# Altium PCB n24_att.PcbDoc
Units mil, origin at the board's own origin, x right, y up, seen from the top; angles counter-clockwise.
Board outline 1125 x 905 mil, 2 copper layers (Top Layer, Bottom Layer); 13 components, 14 nets, 48 pads, 11 vias.
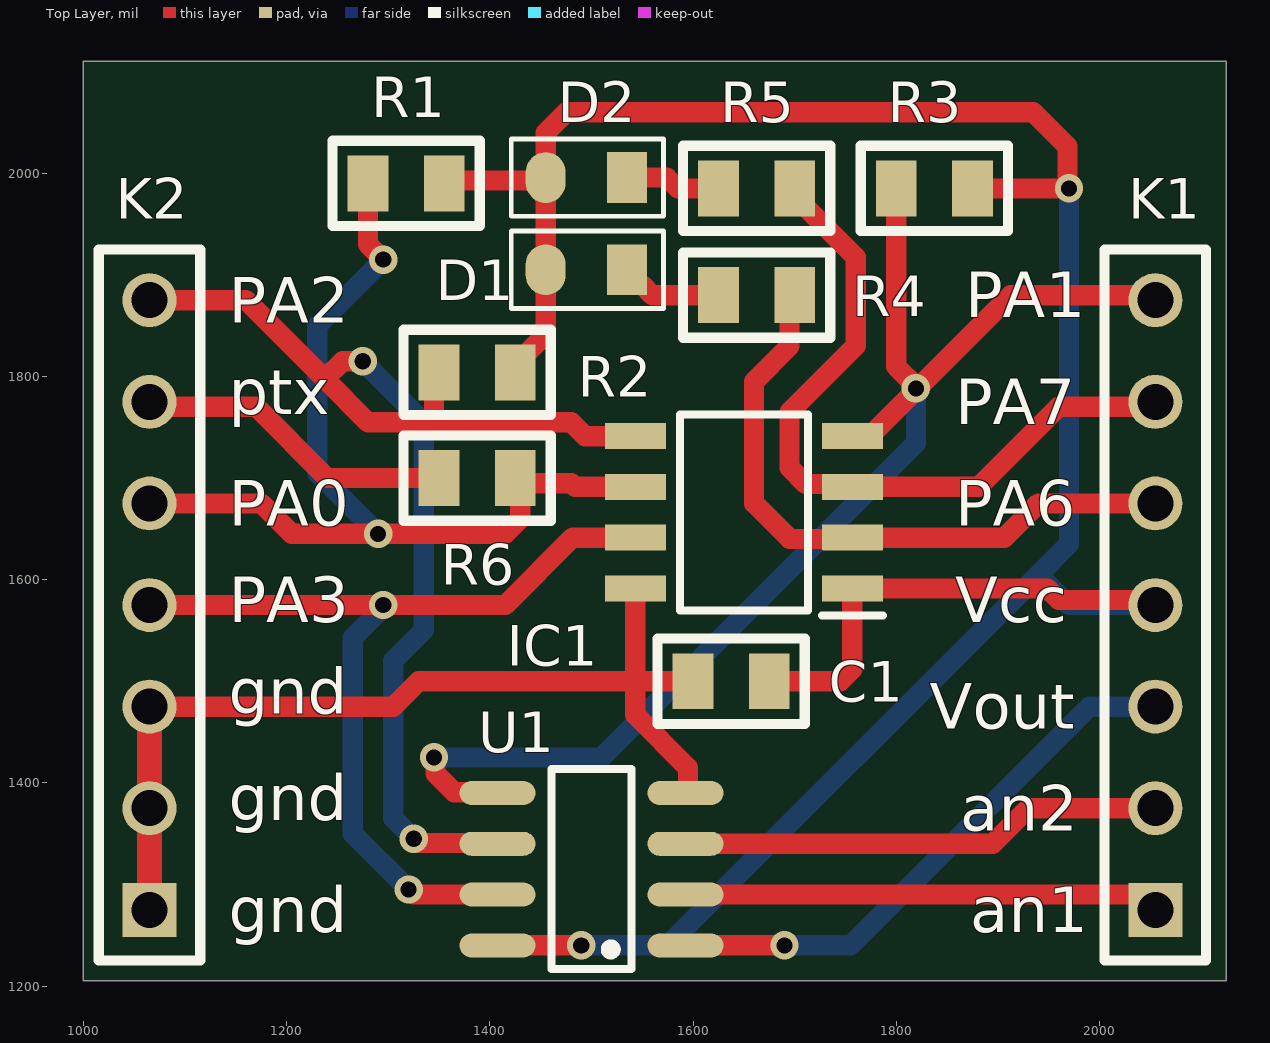
[diagram p0: Top Layer view]
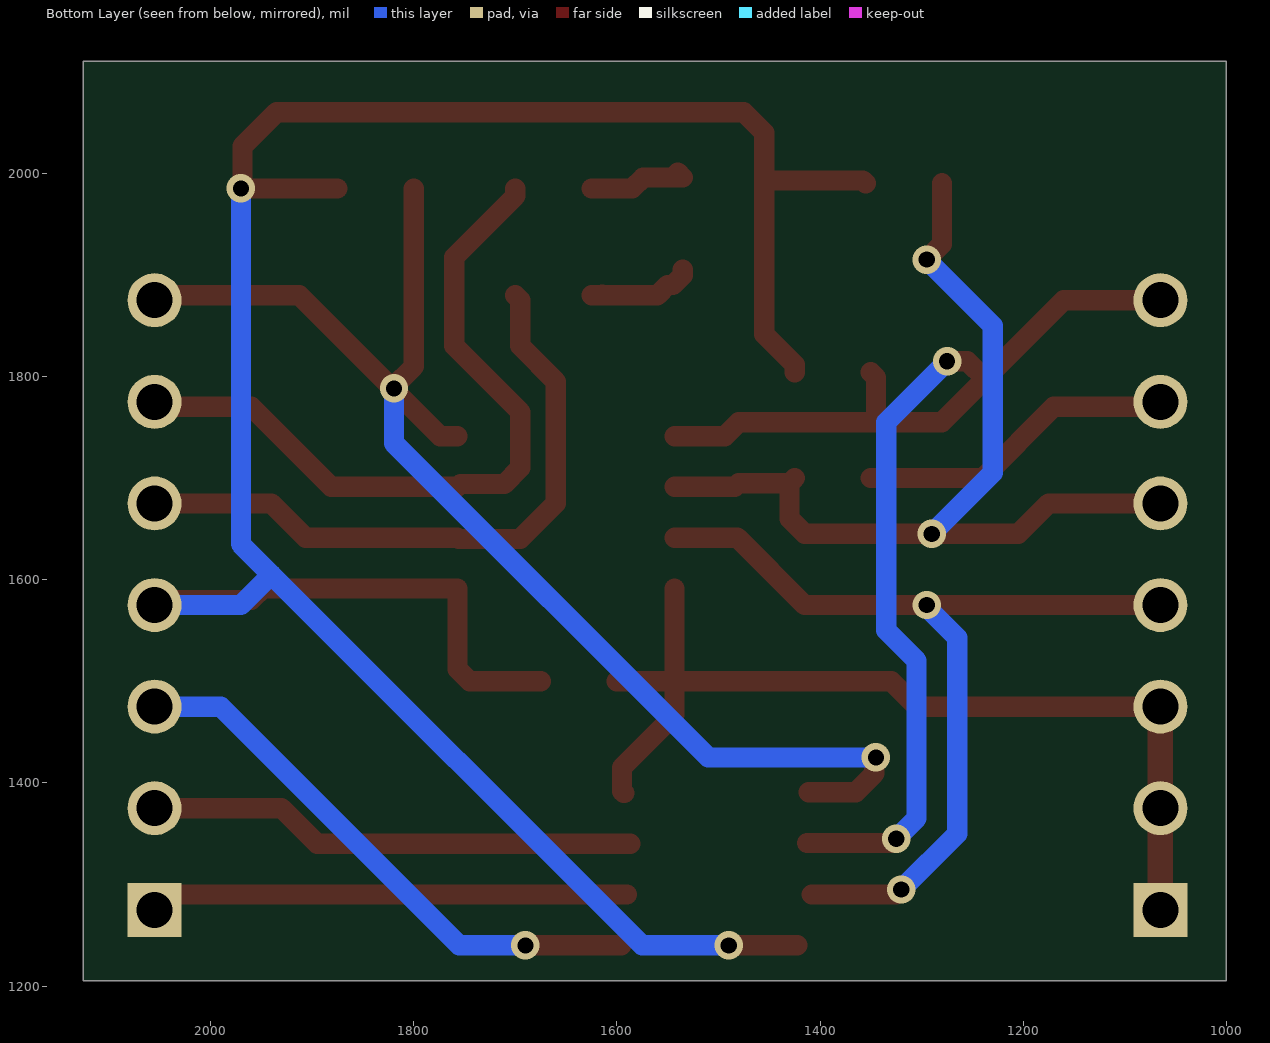
[diagram p1: Bottom Layer view, seen from below]

## Layer stack, top to bottom
Top Solder: solder mask 0.4, Solder Resist, Dk 3.5
Top Layer: signal copper 1.4
Dielectric 1: dielectric 12.6, FR-4, Dk 4.8
Bottom Layer: signal copper 1.4
Bottom Solder: solder mask 0.4, Solder Resist, Dk 3.5

## Board outline
1000,1205 1000,2110 2125,2110 2125,1925 2125,1575 2125,1205

## Design rules (kind name [scope] priority, off if disabled: settings)
Clearance [All] p1: gap=10 ignorepadtopadclearanceinfootprint=FALSE except(0: Arc-Hole Track-Hole SMDPad-Hole THPad-Hole Via-Hole Fill-Hole Poly-Hole Region-Hole Text-Hole)
HoleSize [All] p1: absolutevalues=TRUE maxlimit=200 minlimit=1 maxpercent=80.000 minpercent=20.000
PolygonConnect [All] p1: connectstyle=Relief reliefconductorwidth=10 reliefentries=4 polygonreliefangle="90 Angle" airgapwidth=10
RoutingVias [All] p1: holewidth=28 width=50 viastyle="Through Hole" minholewidth=16 minwidth=28 maxholewidth=28 maxwidth=50
SilkToSolderMaskClearance [IsPad] p1: minsilkscreentomaskgap=4 clearancetoexposedcopper=TRUE
SolderMaskExpansion [All] p1: expansion=4 istentingtop=FALSE
Width [All] p1: maxlimit=100 minlimit=10 preferedwidth=15
28 further rules are at their usual default settings.

## Components (designator, comment, footprint, x,y, rotation, side; value= is the part's Value field where it differs from the comment)
C1 "cap0805" SM0805 1675,1500 r180 top value=0.1
D1 "LIGHT_SM0805" SM0805_diode 1455,1905 r0 top
D2 "LIGHT_SM0805" SM0805_diode 1455,1995.73 r0 top
IC1 "ATTINY412-SSF" SOIC127P600X175-8N 1650,1666.26 r180 top
K1 "7_PLS_2.54mm" 7_PLS_2.54 2055,1275 r180 top
K2 "7_PLS_2.54mm" 7_PLS_2.54 1065,1275 r180 top
R1 "res0805" SM0805 1355,1990 r180 top value=4K7
R2 "res0805" SM0805 1425,1804.01 r180 top value=4K7
R3 "res0805" SM0805 1875,1985 r180 top value=4K7
R4 "res0805" SM0805 1625,1880 r0 top value=2k
R5 "res0805" SM0805 1625,1985 r0 top value=2k
R6 "res0805" SM0805 1425,1700 r180 top value=1k
U1 "n24rf04" SO8_L 1500,1315 r180 top

## Footprints (in the part's own frame and the unit in brackets; to place one, negate y for a bottom-side part, rotate by r counter-clockwise, add the part's x,y. Pads: shape width x height; smd on the part's side, far side on the other; paste and mask are expansions set on the pad)
7_PLS_2.54 [mm] "PLS row"
  rect 1.35x1.35 hole 0.9: 1(0,0)
  round 1.35 hole 0.9: 2(0,-2.54) 3(0,-5.08) 4(0,-7.62) 5(0,-10.16) 6(0,-12.7) 7(0,-15.24)
  silkscreen extent -1.27,-16.51 1.27,1.27
SM0805 [mil]
  rect 40x55 smd: 1(0,0) 2(75,0)
  silkscreen extent -35,-42 110,42
SM0805_diode [mm]
  oval 1x1.27 smd: 1(0,0)
  rect 1x1.27 smd: 2(2.032,0)
  silkscreen extent -0.86,-0.97 2.95,0.97
SO8_L [mm] "SOIC, 8-Leads, Body 4.9x3.9mm, Pitch 1.27mm, IPC High Density"
  oval 1.9x0.6 smd: 1(-2.35,1.905) 2(-2.35,0.635) 3(-2.35,-0.635) 4(-2.35,-1.905) 5(2.35,-1.905) 6(2.35,-0.635) 7(2.35,0.635) 8(2.35,1.905)
  silkscreen extent -1,-2.5 1,2.5, body extent -2,-2.5 2,2.5, height 1.75
SOIC127P600X175-8N [mm]
  rect 1.525x0.65 smd: 1(-2.712,1.905) 2(-2.712,0.635) 3(-2.712,-0.635) 4(-2.712,-1.905) 5(2.712,-1.905) 6(2.712,-0.635) 7(2.712,0.635) 8(2.712,1.905)
  silkscreen extent -3.47,-2.45 1.6,2.58, body extent -3,-2.45 3,2.45, height 1.75

## Part data
C1: "Capacitor", LatestRevisionDate=17-Jul-2002, LatestRevisionNote="Re-released for DXP Platform.", PackageDescription="Radial Cap, Thru-Hole; 2 Leads; 0.3 in Pin Spacing", PackageReference=RAD-0.3, Published=8-Jun-2000, Publisher="Altium Limited"
IC1: "Integrated Circuit", Manufacturer_Name=Microchip, Mouser Part Number=579-ATTINY412-SSF, Arrow Part Number=ATTINY412-SSF, Arrow Price/Stock=https://www.arrow.com/en/products/attiny412-ssf/microchip-technology, Datasheet Link=https://componentsearchengine.com/Datasheets/1/ATTINY412-SSF.pdf, Height=1.75mm, Manufacturer_Part_Number=ATTINY412-SSF, Mouser Price/Stock=https://www.mouser.co.uk/ProductDetail/Microchip-Technology/ATTINY412-SSF?qs=3HJ2avRr9PLjr%252BAvU6bmFQ%3D%3D
K1 K2: "7 pin vertical 2.54mm"
R1 R2 R3 R4 R5 R6: "Resistor", LatestRevisionDate=29-May-2009, LatestRevisionNote="IPC-7351 Footprint Added.", PackageDescription="Chip Resistor", PackageReference=J1-0603, Published=8-Jun-2000, Publisher="Altium Limited"
U1: "eeprom & nfc tag"

## Via types
v1: diameter 28, hole 16, Top Layer to Bottom Layer, 11 vias

## Nets (pads, with @x,y where several pads share a name; then routed paths per layer and width w, separated by ;. In a path a pad name is that pad's centre, name@x,y a point inside that pad or via, vN(x,y) a via of type N, cw(c..) or ccw(c..) an arc to the next point about the centre after c; other vN are vias at no path point)
an1: K1.1 U1.2 | length 471.1
  Top Layer w20: U1.2@1590.1,1290 2040,1290 K1.1
an2: K1.2 U1.3 | length 482.8
  Top Layer w20: U1.3@1586.74,1340 1895,1340 1930,1375 K1.2
GND: C1.2 IC1.8 K2.1 K2.2 K2.3 U1.4 | length 969.6
  Top Layer w20: K2.3 1305,1475 1330,1500 1543.23,1500 ; IC1.8 1543.23,1500 ; U1.4 1593.33,1390 1595,1391.67 1595,1415 1543.23,1466.77 1543.23,1500 ; C1.2 1543.23,1500
  Top Layer w25: K2.1 K2.2 K2.3
NetD1_2: D1.2 R4.1 | length 104.2
  Top Layer w20: D1.2 1535,1899.69 1544.69,1890 1550,1890 1560,1880 R4.1@1615,1880 ; R4.1@1614.51,1880.49 R4.1@1615,1880 ; R4.1 R4.1@1615,1880
NetD2_2: D2.2 R5.1 | length 101.5
  Top Layer w20: D2.2@1540,2000.73 D2.2 1574.27,1995.73 1585,1985 R5.1
NetK2_6: K2.6 R6.2 | length 316.1
  Top Layer w20: K2.6 1070,1770 1170,1770 1240,1700 R6.2
rx: IC1.3 K1.6 R5.2 | length 729.2
  Top Layer w20: R5.2 1700,1977.5 1760,1917.5 1760,1830 1695,1765 1695,1710 1710.94,1694.06 1753.98,1694.06 IC1.3 1881.26,1691.26 1960,1770 2050,1770 K1.6
scl: IC1.5 K2.7 R2.2 U1.6 | length 1234.7
  Top Layer w20: K2.7 1160,1875 1237.5,1797.5 ; v1(1275,1815) 1255,1815 1237.5,1797.5 ; v1(1325,1345) 1329.31,1340.69 U1.6@1412.85,1340.69 ; R2.2 1345,1799.01 1345,1755 ; IC1.5 1493.74,1741.26 1480,1755 1345,1755 ; 1237.5,1797.5 1280,1755 1345,1755
  Bottom Layer w20: v1(1275,1815) 1335,1755 1335,1550 1305,1520 1305,1365 v1(1325,1345)
sda: IC1.4 K1.7 R3.2 U1.5 | length 1309
  Top Layer w20: v1(1345,1425) 1346.53,1423.47 1346.53,1409.13 1364.96,1390.69 U1.5@1411.28,1390.69 ; IC1.4 1774,1741.26 v1@1820.16,1787.42 ; R3.2 1800,1809.75 1820.16,1789.59 v1@1820.16,1787.42 ; K1.7 2050,1880 1912.73,1880 v1@1820.16,1787.42
  Bottom Layer w20: v1(1345,1425) 1510,1425 1819.35,1734.35 v1(1819.35,1788.23)
tx: IC1.2 K1.5 R4.2 | length 645.6
  Top Layer w20: R4.2 1695,1875 1695,1830 1660,1795 1660,1675 1695,1640 1755.51,1640 IC1.2 1906.26,1641.26 1940,1675 K1.5
updi: IC1.6 K2.5 R1.2 R6.1 | length 943.5
  Top Layer w20: K2.5 1175,1675 1205,1645 v1(1290,1645) 1415,1645 1430,1660 R6.1@1430,1695 ; R1.2 1280,1930 v1(1295,1915) ; R6.1 R6.1@1430,1695 ; IC1.6 1483.74,1691.26 1480,1695 R6.1@1430,1695
  Bottom Layer w20: v1(1290,1645) 1230,1705 1230,1850 v1(1295,1915)
VCC: C1.1 D1.1 D2.1 IC1.1 K1.4 R1.1 R2.1 R3.1 U1.8 | length 2683.2
  Top Layer w20: R1.1 1357.87,1992.87 1452.13,1992.87 D2.1 ; U1.8@1422.48,1240 v1(1490,1240) ; R2.1 1425,1811.51 1455,1841.51 D1.1 D2.1 ; C1.1 1745,1500 1756.77,1511.77 IC1.1 1948.74,1591.26 1960,1580 2050,1580 K1.4 ; R3.1 v1(1970,1985) 1968.47,1986.53 1968.47,2026.53 1935,2060 1475,2060 1455,2040 D2.1
  Bottom Layer w20: v1(1490,1240) 1575,1240 1940,1605 ; v1(1970,1985) 1970,1635 1940,1605 ; K1.4 1970,1575 1940,1605
vout: K1.3 U1.1 | length 556.8
  Top Layer w20: U1.1@1595.49,1240 v1(1690,1240)
  Bottom Layer w20: v1(1690,1240) 1755,1240 1990,1475 K1.3
wp: IC1.7 K2.4 U1.7 | length 911.1
  Top Layer w20: K2.4 v1(1295,1575) 1415,1575 1481.26,1641.26 IC1.7 ; v1(1320,1295) 1325,1290 U1.7@1408.14,1290
  Bottom Layer w20: v1(1295,1575) 1295,1572.84 1265,1542.84 1265,1350 v1(1320,1295)

## Silkscreen, mask and mechanical layers (free items; w line width, h text height)
Top Overlay:
  text "PA1" at 1868,1858 h45
  text "PA2" at 1143,1853 h45
  text "ptx" at 1143,1763 h45
  text "PA7" at 1858,1753 h45
  text "PA0" at 1143,1653 h45
  text "PA6" at 1858,1653 h45
  text "PA3" at 1143,1558 h45
  text "Vcc" at 1858,1558 h45
  text "gnd" at 1143,1468 h45
  text "Vout" at 1833,1453 h45
  text "gnd" at 1143,1363 h45
  text "an2" at 1863,1353 h45
  text "gnd" at 1143,1253 h45
  text "an1" at 1873,1253 h45
Mechanical 1:
  lines w10: 1000,1205 2125,1205 2125,2110 1000,2110 1000,1205